# Altium PCB PIR Sensor driver v4.PcbDoc
Units mm, origin at the board's own origin, x right, y up, seen from the top; angles counter-clockwise.
Board outline 152.4 x 101.6 mm, 2 copper layers (Top Layer, Bottom Layer); 12 components, 11 nets, 38 pads, 2 vias.
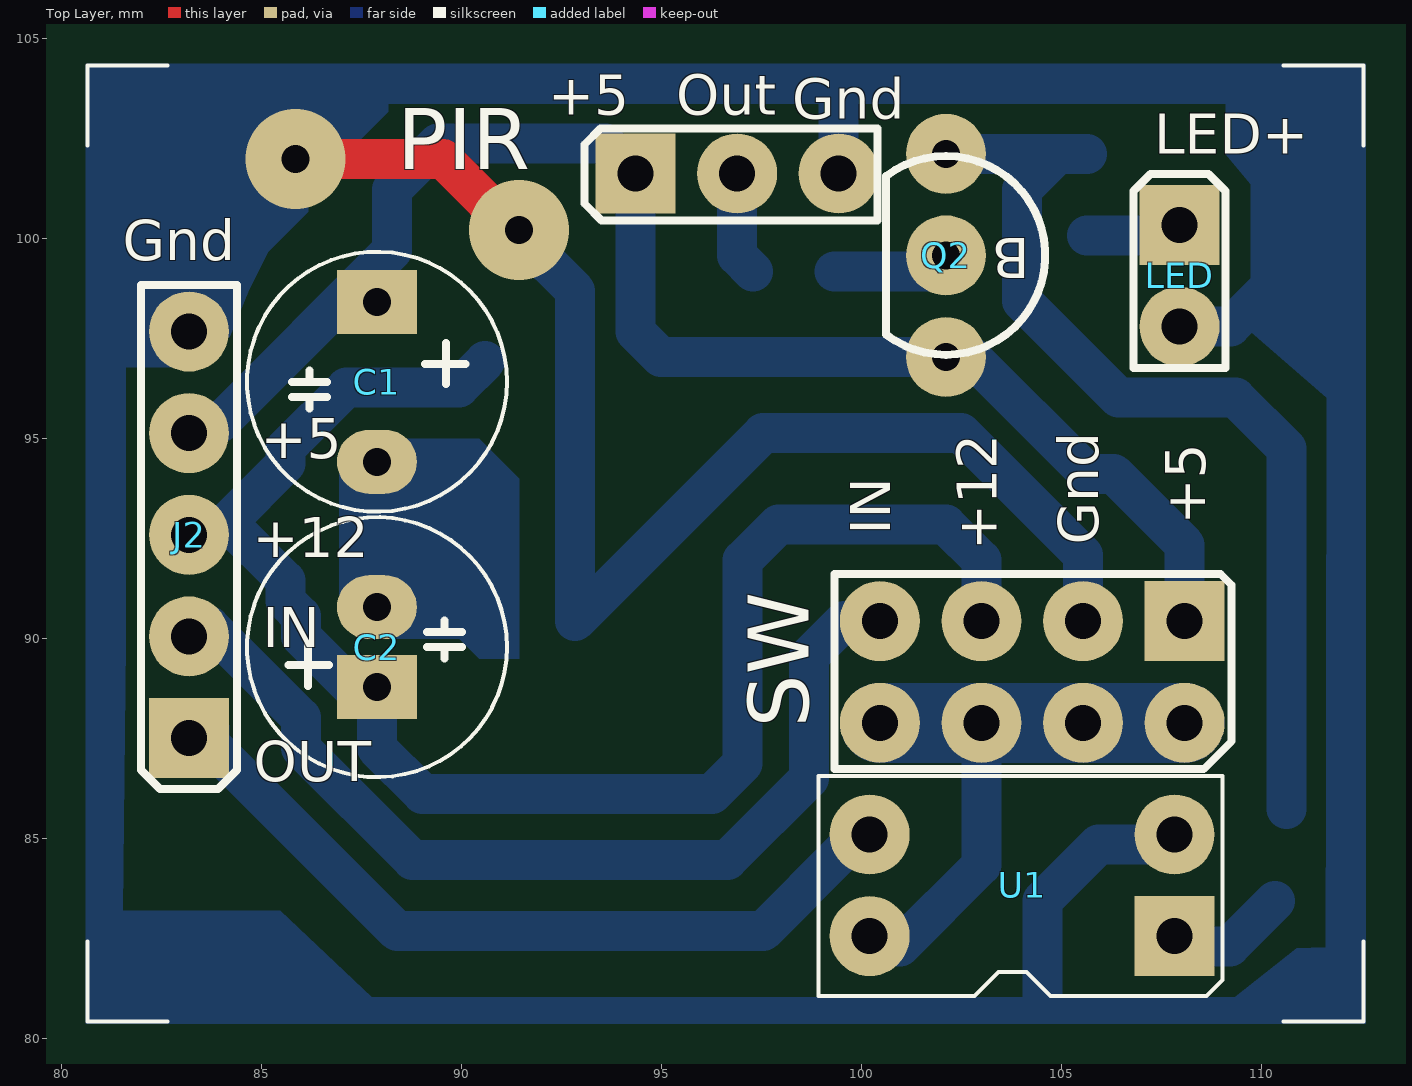
[diagram p0: Top Layer view]
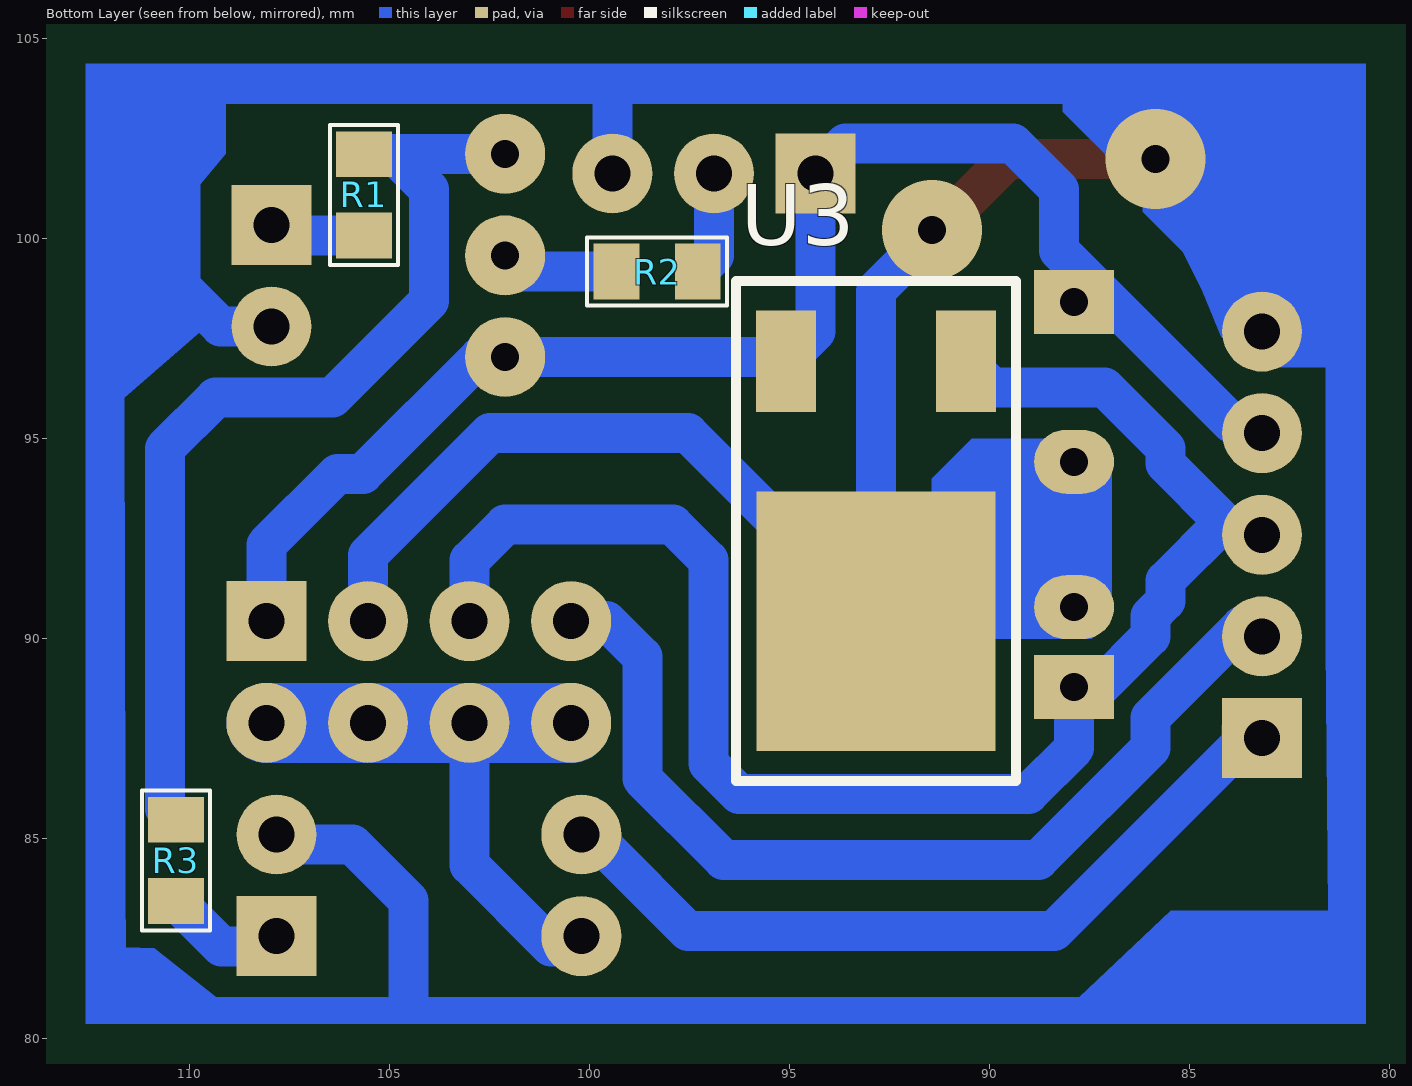
[diagram p1: Bottom Layer view, seen from below]
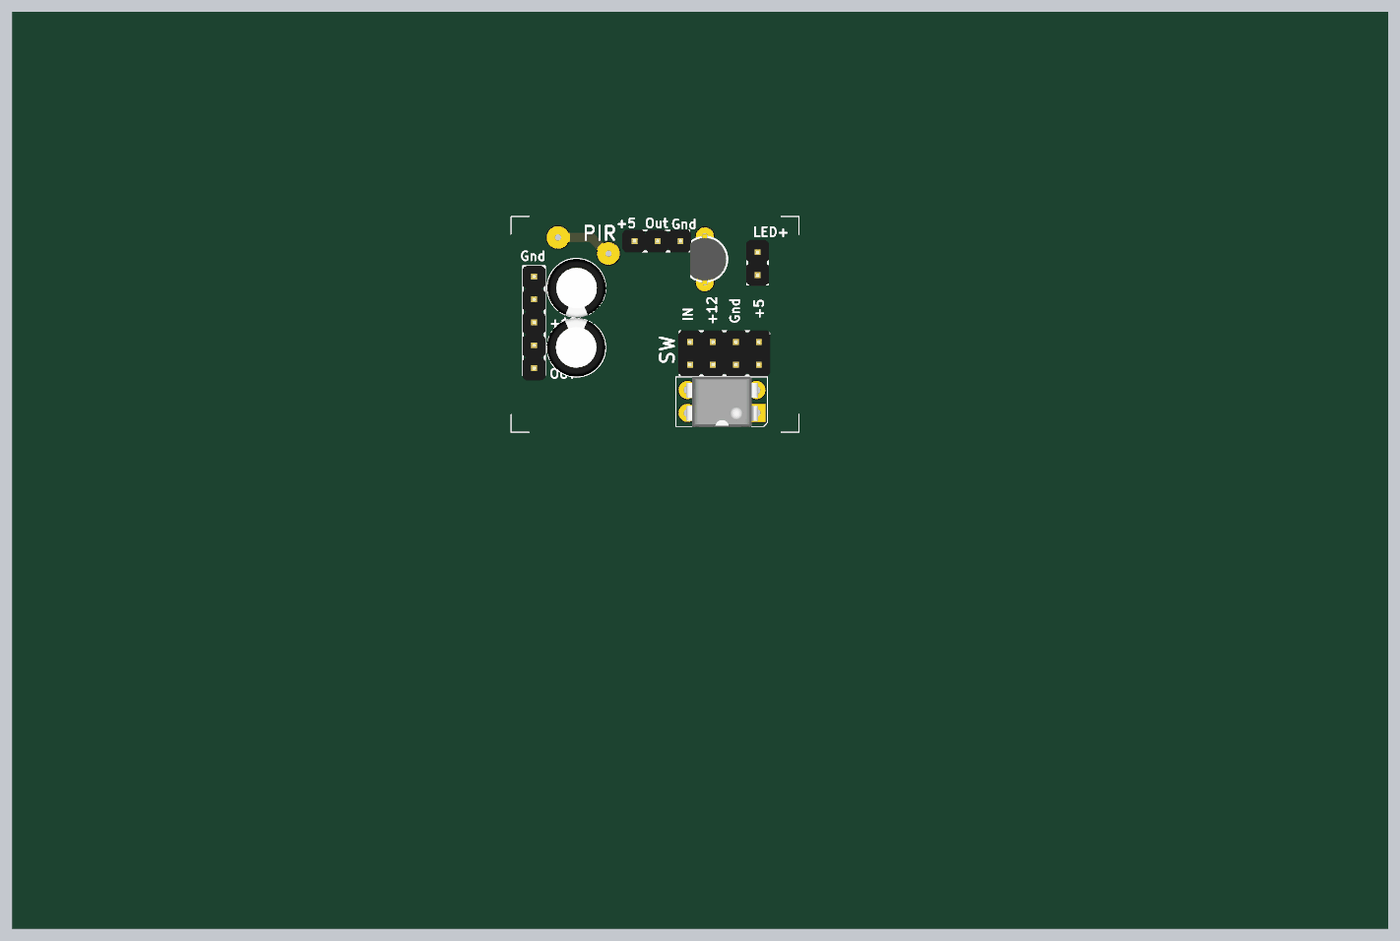
[diagram p2: 3D render of the assembled board from above, using the file's embedded part models]
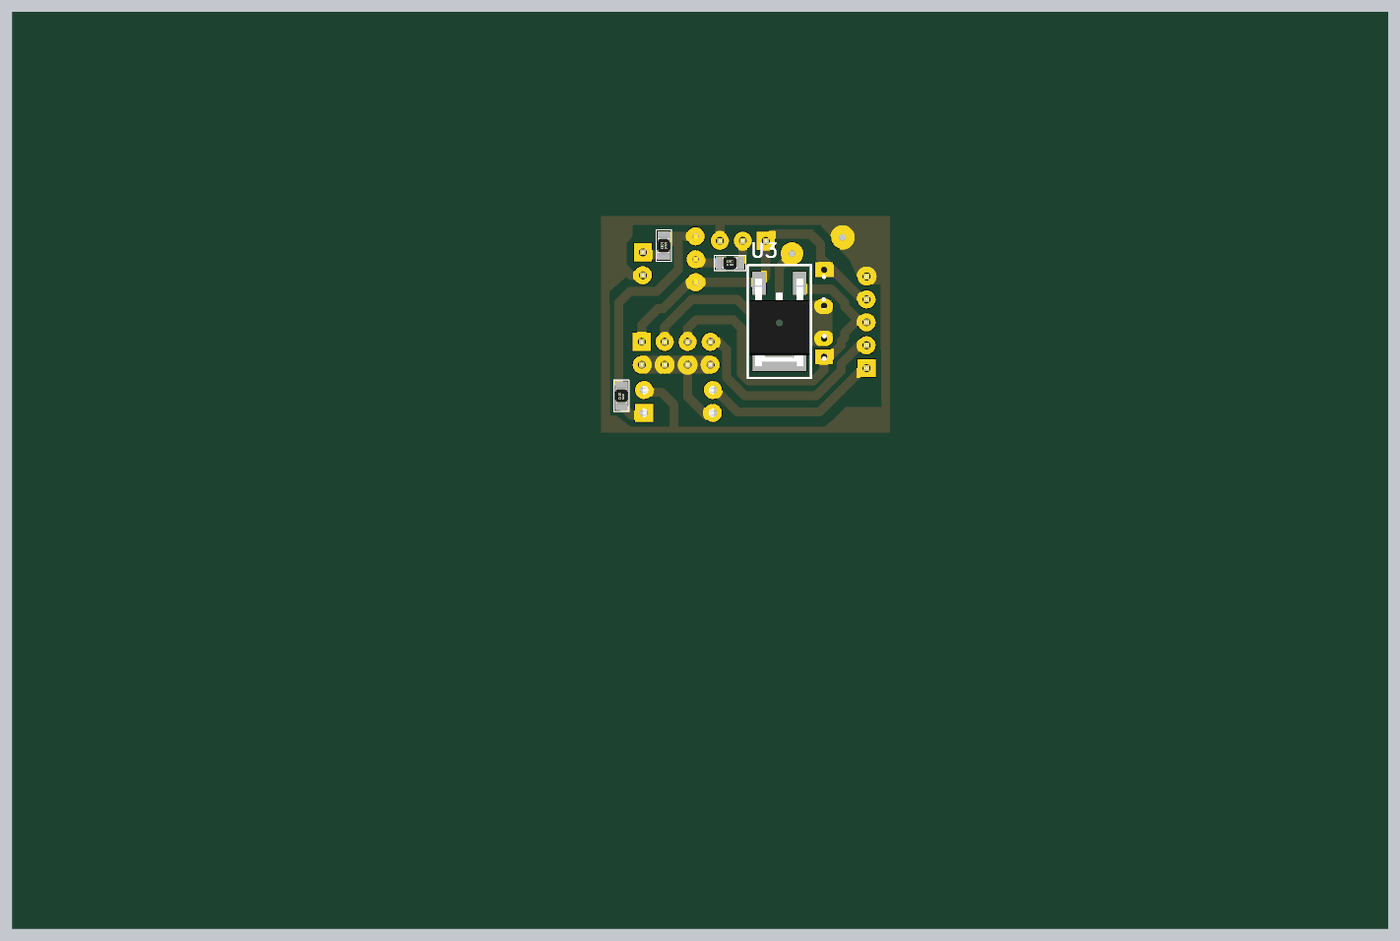
[diagram p3: 3D render of the assembled board from below, using the file's embedded part models]

## Layer stack, top to bottom
Top Solder: solder mask 0.0102, Solder Resist, Dk 3.5
Top Layer: signal copper 0.0356
Dielectric 1: dielectric 0.32, FR-4, Dk 4.8
Bottom Layer: signal copper 0.0356
Bottom Solder: solder mask 0.0102, Solder Resist, Dk 3.5

## Board outline
25.4,25.4 177.8,25.4 177.8,127 25.4,127

## Design rules (kind name [scope] priority, off if disabled: settings)
Clearance [All] p1: gap=0.254
ComponentClearance [All] p1: gap=0 collisioncheckmode=3 verticalgap=0 showdistances=FALSE
PolygonConnect [All] p1: connectstyle=Relief reliefconductorwidth=0.254 reliefentries=4 polygonreliefangle="90 Angle" airgapwidth=0.254
RoutingVias [All] p1: holewidth=0.711 width=1.27 viastyle="Through Hole" minholewidth=0.711 minwidth=1.27 maxholewidth=0.711 maxwidth=1.27
SolderMaskExpansion [All] p1: expansion=0.102
Width [All] p1: maxlimit=2 minlimit=0.5 preferedwidth=1
28 further rules are at their usual default settings.

## Components (designator, comment, footprint, x,y, rotation, side; value= is the part's Value field where it differs from the comment)
C1 "220mF 16v" "Cap E p4mm D6.5xH11" 87.884,97.409 r270 top
C2 "220mF 16v" "Cap E p2mm D6.5xH11" 87.884,88.773 r90 top
J2 "connector" "Line 2.54 x 5 - (D2mm)" 83.185,87.503 r180 top
LED "PLS-2" "Line 2.54 x 2" 107.95,100.33 r0 top
PIR "PLS-3" "Line 2.54 X 3" 94.348,101.615 r90 top
Q2 "S9014" "TO-92 2.54 (EBC)" 102.108,99.568 r180 top
R1 "560 Om" "SMD 0805 (2012)" 105.664,102.108 r270 bottom
R2 "1 kOm" "SMD 0805 (2012)" 97.282,99.187 r0 bottom
R3 "560 Om" "SMD 0805 (2012)" 110.363,85.471 r270 bottom
SW "PLD-8 (2 x 4)" "Line 2.54 X 8D (2 x 4)" 108.077,90.424 r270 top
U1 "Optocouplier" DIP-4 107.823,82.55 r180 top
U3 "7805C" D-PAK 92.837,90.424 r90 bottom

## Footprints (in the part's own frame and the unit in brackets; to place one, negate y for a bottom-side part, rotate by r counter-clockwise, add the part's x,y. Pads: shape width x height; smd on the part's side, far side on the other; paste and mask are expansions set on the pad)
"Cap E p2mm D6.5xH11" [mm] "D 6.5mm; H 11mm"
  rect 1.6x2 hole 0.7: 1(0,0)
  oval 1.6x2 hole 0.7: 2(2,0)
  silkscreen extent -2.25,-3.25 4.25,3.25, body extent -2.22,-3.22 4.27,3.28, height 11.49
"Cap E p4mm D6.5xH11" [mm] "D 6.5mm; H 11mm"
  rect 1.6x2 hole 0.7: 1(-1,0)
  oval 1.6x2 hole 0.7: 2(3,0)
  silkscreen extent -2.25,-3.25 4.25,3.25, body extent -2.22,-3.22 4.27,3.28, height 11.49
D-PAK [mm]
  rect 2.54x1.5 smd: 1(6.5,-2.25) 3(6.5,2.25)
  rect 6.48x5.97 smd: 2(0,0)
  silkscreen extent -4,-3.5 8.5,3.5, body extent -2.7,-3.29 7,3.29, height 2.3
DIP-4 [mm]
  rect 2x2 hole 0.9: 1(0,0)
  round 2 hole 0.9: 2(0,-2.54) 3(7.62,0) 4(7.62,-2.54)
  silkscreen extent -1.2,-4 8.9,1.5, body extent -0.2,-4 7.8,1.54, height 4.31
"Line 2.54 x 2" [mm]
  rect 2x2 hole 0.9: 1(0,0)
  round 2 hole 0.9: 2(0,-2.54)
  silkscreen extent -1.15,-3.57 1.15,1.28, body extent -1.25,-3.69 1.25,1.39, height 8.3
"Line 2.54 X 3" [mm]
  rect 2x2 hole 0.9: 1(0,0)
  round 2 hole 0.9: 2(0,-2.54) 3(0,-5.08)
  silkscreen extent -1.17,-6.05 1.12,1.27, body extent -1.27,-6.24 1.22,1.38, height 8.2
"Line 2.54 x 5 - (D2mm)" [mm]
  rect 2x2 hole 0.9: 1(0,0)
  round 2 hole 0.9: 2(0,-2.54) 3(0,-5.08) 4(0,-7.62) 5(0,-10.16)
  silkscreen extent -1.2,-11.32 1.2,1.28, body extent -1.25,-11.33 1.25,1.37, height 8.2
"Line 2.54 X 8D (2 x 4)" [mm]
  rect 2x2 hole 0.9: 1(0,0)
  round 2 hole 0.9: 2(2.54,0) 3(0,-2.54) 4(2.54,-2.54) 5(0,-5.08) 6(2.54,-5.08) 7(0,-7.62) 8(2.54,-7.62)
  silkscreen extent -1.17,-8.75 3.7,1.17, body extent -1.27,-8.88 3.81,1.28, height 8.6
"SMD 0805 (2012)" [mil]
  rect 45x55 smd: 1(0.35,0.98) 2(80.35,0.98)
  silkscreen extent -29,-32 109,34, body extent 1,-24 80,26, height 18
"TO-92 2.54 (EBC)" [mm] "TO, Flat Index; 3 In-Line, Axial Leads; Body Dia. 4.5mm; Leads 0.51 x 0.48 mm (max)"
  round 2 hole 0.7: B(0,0) C(0,2.54) E(0,-2.54)
  silkscreen extent -2.48,-2.48 1.5,2.48, body extent -2.37,-2.79 1.6,2.79, height 5.7

## Part data
C1 C2: library part "Cap E 220mF x 16V", "Capacitor"
J2: library part PLS-5, "Vert, Sgl line, Male"
LED PIR SW: "Vert, Sgl line, Male"
Q2: "NPN Bipolar Transistor"
R1 R2 R3: library part "Res SMD 0805"
U1: library part "Optocouplier LTV 817B"
U3: "Voltage Regulator"

## Via types
v1: diameter 2.5, hole 0.7, Top Layer to Bottom Layer, 2 vias

## Nets (pads, with @x,y where several pads share a name; then routed paths per layer and width w, separated by ;. In a path a pad name is that pad's centre, name@x,y a point inside that pad or via, vN(x,y) a via of type N, cw(c..) or ccw(c..) an arc to the next point about the centre after c; other vN are vias at no path point)
+5V: C1.1 J2.4 PIR.1 Q2.C SW.1 U3.3 | length 36.3
  Bottom Layer w1: J2.4@83.947,95.377 88.265,99.695 88.265,101.219 89.408,102.362 93.601,102.362 PIR.1 94.348,97.663 94.983,97.028 Q2.C 102.743,97.028 105.664,94.107 106.299,94.107 108.077,92.329 SW.1
+12V: C2.1 J2.3 SW.5 U3.1 | length 39.2
  Bottom Layer w1: U3.1 89.929,96.266 87.122,96.266 85.598,94.742 85.598,94.361 84.138,92.9 85.598,91.44 85.598,90.932 85.979,90.551 85.979,90.043 87.249,88.773 C2.1 87.884,87.249 89.027,86.106 96.266,86.106 97.028,86.868 97.028,91.948 97.917,92.837 102.108,92.837 102.997,91.948 SW.5
"ALARM IN": J2.2 SW.7 | length 23.9
  Bottom Layer w1: J2.2@83.693,90.297 85.979,88.011 85.979,87.249 88.773,84.455 96.647,84.455 98.679,86.487 98.679,89.535 99.568,90.424 SW.7
"ALARM OUT": J2.1 U1.4 | length 19.3
  Bottom Layer w1: J2.1@83.693,87.757 83.693,87.376 88.392,82.677 97.536,82.677 99.568,84.709 U1.4@99.822,84.709
GND: C1.2 C2.2 J2.5 LED.2 PIR.3 SW.3 U1.2 U3.2 | length 47.6
  Top Layer w1: v1(85.852,101.981) 89.535,101.981 v1@91.567,99.949
  Bottom Layer w1: v1@91.567,99.949 92.837,98.679 U3.2 97.536,95.123 102.489,95.123 105.537,92.075 SW.3 ; PIR.3 99.428,103.746 ; 104.521,80.899 104.521,83.439 105.918,84.836 U1.2@107.823,84.836 ; LED.2 109.22,97.79 111.76,100.33
  other v1: 91.44,100.203
NetLED_1: LED.1 R1.2 | length 2.4
  Bottom Layer w1: R1.2 107.687,100.067 LED.1
NetQ2_B: Q2.B R2.2 | length 2.4
  Bottom Layer w1: R2.2 Q2.B@101.702,99.162
NetR3_2: R3.2 U1.1 | length 3
  Bottom Layer w1: U1.1@107.823,82.296 109.204,82.296 R3.2
NetSW_2: SW.2 SW.4 SW.6 SW.8 U1.3 | length 14.8
  Bottom Layer w1: U1.3@100.203,82.296 100.965,82.296 102.997,84.328 SW.6
  Bottom Layer w2: SW.8 SW.6 SW.4 SW.2
"SENSOR OUT": PIR.2 R2.1 | length 2.6
  Bottom Layer w1: PIR.2 96.888,99.565 R2.1
"SENSOR OUT P": Q2.E R1.1 R3.1 | length 24.7
  Bottom Layer w1: Q2.E 104.902,102.108 ; R1.1@105.63,102.108 104.902,102.108 ; R3.1@110.617,85.725 110.617,94.742 109.347,96.012 106.426,96.012 104.013,98.425 104.013,101.219 104.902,102.108

## Other copper
Bottom Layer:
  region net GND: 80.598,104.365 80.598,80.365 111.598,80.365 111.6,82.275 110.875,82.25 109.325,81.025 87.757,81.026 85.471,83.185 81.534,83.185 81.598,89.865 81.598,100.365 84.598,100.365 84.598,103.365 109.098,103.365 109.093,102.108 109.728,101.346 109.728,97.663 111.633,96.012 111.598,80.365 112.598,80.365 112.598,104.365
  region net GND: 86.94,94.48 86.94,90.48 87.44,89.98 89.94,89.98 90.44,89.48 91.44,89.48 91.44,93.98 90.44,94.98 87.94,94.98
  region net GND: 88.171,104.161 88.171,103.161 86.171,101.161 86.171,100.661 85.171,99.661 84.671,98.661 84.201,97.536 83.185,96.774 80.645,96.774 80.671,104.161

## Silkscreen, mask and mechanical layers (free items; w line width, h text height)
Top Overlay:
  lines w0.1: 80.649,82.413 80.649,80.413 82.649,80.413 ; 80.649,102.313 80.649,104.313 82.649,104.313 ; 110.549,80.413 112.549,80.413 112.549,82.413 ; 110.549,104.313 112.549,104.313 112.549,102.313
  text "+5" at 92.171,103.08 h1
  text "Out" at 95.371,103.08 h1
  text "Gnd" at 98.271,102.98 h1
  text "LED+" at 107.315,102.108 h1
  text "Gnd" at 81.534,99.441 h1
  text "+5" at 84.975,94.5 h1
  text "+5" at 108.585,92.837 h1 r90
  text "IN" at 100.711,92.583 h1 r90
  text "Gnd" at 105.918,92.329 h1 r90
  text "+12" at 103.378,92.202 h1 r90
  text "+12" at 84.775,92.025 h1
  text "IN" at 85.025,89.775 h1
  text "OUT" at 84.8,86.425 h1

## Text inside footprints (layer, text, board x,y; h text height)
Q2: Top Overlay "B" at 104.208,99.993 h1 r180